# Allegro board LEXICON_GLOVE_6.brd
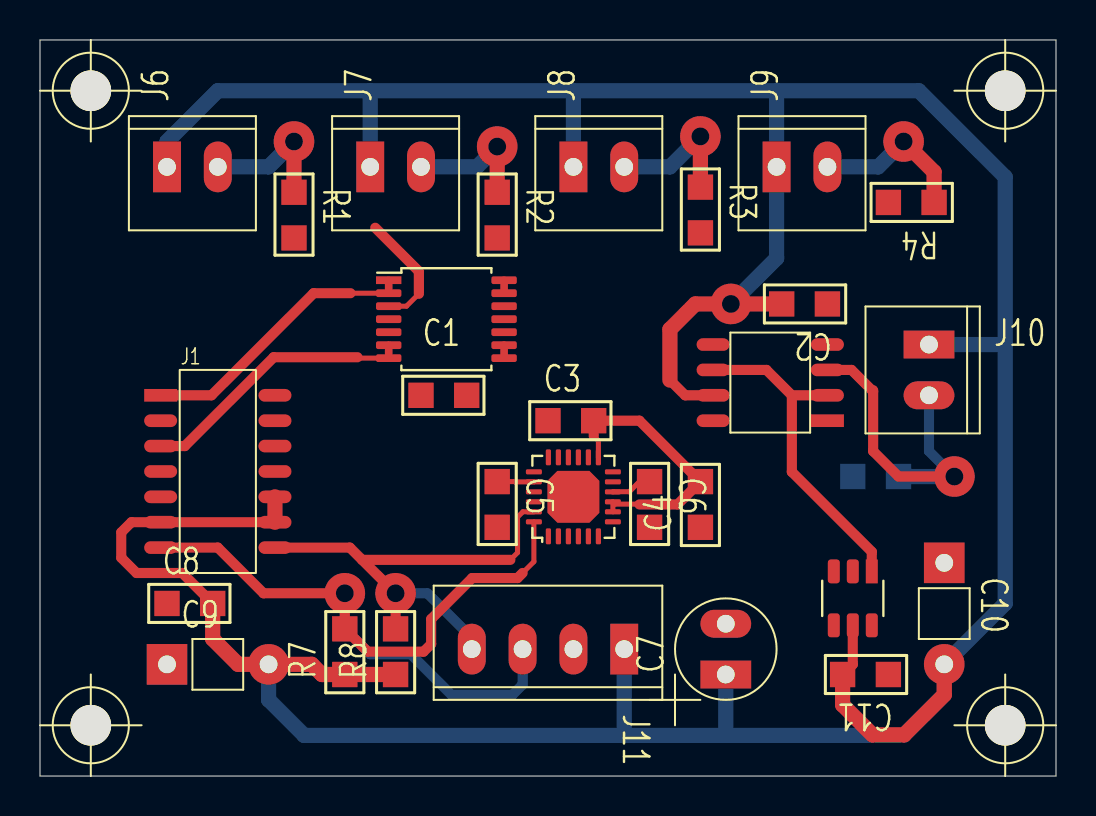
[diagram p0: board, top side]
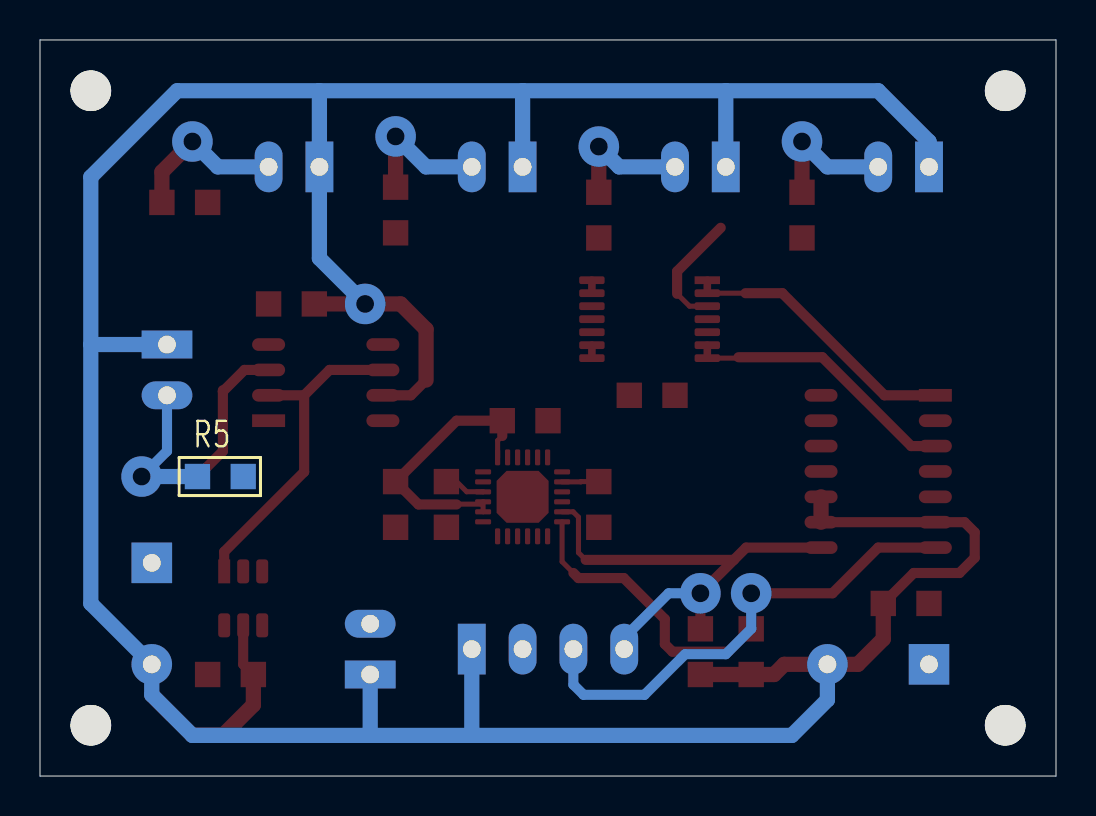
[diagram p1: board, bottom side, seen from below]

Outline 50.8 x 36.83 mm; copper layers: TOP, BOTTOM. Coordinates in mm from the lower left corner of the outline.
Outline path: 0,36.83 0,0 50.8,0 50.8,36.83 0,36.83

## Design rules (mm)
constraint set DEFAULT: min track width 0.254

## Placement (name value [footprint] x y rotation side)
C1  100n  [GU-R0805]  19.05 19.05 0 top
C2  100n  [GU-R0805]  39.37 23.62 180 top
C3  100n  [GU-R0805]  25.4 17.78 0 top
C4  10n  [GU-R0805]  33.02 12.45 90 top
C5  2n2  [GU-R0805]  22.86 14.73 270 top
C6  100n  [GU-R0805]  30.48 14.73 270 top
C7  10u  [GU-CAPCYL100]  34.29 5.08 90 top
C8  100n  [GU-R0805]  6.35 8.64 0 top
C9  10u  [GU-RC200]  6.35 5.59 0 top
C10  10u  [GU-RC200]  45.21 10.67 270 top
C11  100n  [GU-R0805]  42.42 5.08 180 top
J1  MCP3428  [GU-SOIC14]  8.89 15.24 0 top
J3  MCP3421  [SOT23-6P95_280X145L45X37]  40.64 8.89 180 top
J5  MPU-6050  [QFN25P50_400X400X95L35X24T260]  26.67 13.97 0 top
J6  F1  [GU-MOLEX2]  6.35 30.48 90 top
J7  F2  [GU-MOLEX2]  16.51 30.48 90 top
J8  F3  [GU-MOLEX2]  26.67 30.48 90 top
J9  F4  [GU-MOLEX2]  36.83 30.48 90 top
J10  F5  [GU-MOLEX2]  44.45 21.59 0 top
J11  PI  [GU-MOLEX4]  29.21 6.35 270 top
NOREF  -  [unnamed]  2.54 2.54 0 top
NOREF#2  -  [unnamed]  48.26 34.29 0 top
NOREF#3  -  [unnamed]  2.54 34.29 0 top
NOREF#4  -  [unnamed]  48.26 2.54 0 top
R1  33k  [GU-R0805]  12.7 29.21 270 top
R2  33k  [GU-R0805]  22.86 29.21 270 top
R3  33k  [GU-R0805]  33.02 29.46 270 top
R4  33k  [GU-R0805]  44.7 28.7 180 top
R5  33k  [GU-R0805]  42.93 14.99 180 bottom
R7  10k  [GU-R0805]  15.24 5.08 90 top
R8  10k  [GU-R0805]  17.78 5.08 90 top
U1  TL074  [SOP14P65_500X640X120L60X24]  20.32 22.86 270 top
U2  TL071  [GU-SOIC8]  39.37 17.78 180 top

## Library data of the parts
C1-C6 C8-C11 = CAP NP
C7 = C
J1 = CON14C
J3 = CON6AP_0
J5 = CON24C_2
J6-J10 = CON2
J11 = CON4
R1-R5 R7 R8 = RESISTOR
U1 = TL074
U2 = TL071_1

## Footprints (pads in the part's own frame, mm; a bottom-side part is the same pattern mirrored in y, then rotated)
GU-CAPCYL100
  rect 1.397x2.54 hole 0.889: 1(0,0)
  oval 1.397x2.54 hole 0.889: 2(2.54,0)
GU-MOLEX2
  rect 2.54x1.397 hole 0.889: 1(0,0)
  oval 2.54x1.397 hole 0.889: 2(0,-2.54)
GU-MOLEX4
  rect 2.54x1.397 hole 0.889: 1(0,0)
  oval 2.54x1.397 hole 0.889: 2(0,-2.54) 3(0,-5.08) 4(0,-7.62)
GU-R0805
  rect 1.27x1.27 smd: 1(0,0) 2(2.286,0)
GU-RC200
  rect 2.032x2.032 hole 0.889: 1(0,0)
  round 2.032 hole 0.889: 2(5.08,0)
GU-SOIC8
  rect 1.651x0.635 smd: 1(0,0)
  oval 1.651x0.635 smd: 2(0,-1.27) 3(0,-2.54) 4(0,-3.81) 5(5.715,-3.81) 6(5.715,-2.54) 7(5.715,-1.27) 8(5.715,0)
GU-SOIC14
  rect 1.651x0.635 smd: 1(-2.857,3.81)
  oval 1.651x0.635 smd: 2(-2.857,2.54) 3(-2.857,1.27) 4(-2.857,0) 5(-2.857,-1.27) 6(-2.857,-2.54) 7(-2.857,-3.81) 8(2.857,-3.81) 9(2.857,-2.54) 10(2.857,-1.27) 11(2.857,0) 12(2.857,1.27) 13(2.857,2.54) 14(2.857,3.81)
QFN25P50_400X400X95L35X24T260
  rrect 0.26x0.8 smd: 1(-1.25,-1.975) 2(-0.75,-1.975) 3(-0.25,-1.975) 4(0.25,-1.975) 5(0.75,-1.975) 6(1.25,-1.975) 13(1.25,1.975) 14(0.75,1.975) 15(0.25,1.975) 16(-0.25,1.975) 17(-0.75,1.975) 18(-1.25,1.975)
  rrect 0.8x0.26 smd: 7(1.975,-1.25) 8(1.975,-0.75) 9(1.975,-0.25) 10(1.975,0.25) 11(1.975,0.75) 12(1.975,1.25) 19(-1.975,1.25) 20(-1.975,0.75) 21(-1.975,0.25) 22(-1.975,-0.25) 23(-1.975,-0.75) 24(-1.975,-1.25)
  rrect 2.6x2.6 smd: 25(0,0)
SOP14P65_500X640X120L60X24
  rect 0.39x1.27 smd: 1(-1.95,-2.885)
  rrect 0.39x1.27 smd: 2(-1.3,-2.885) 3(-0.65,-2.885) 4(0,-2.885) 5(0.65,-2.885) 6(1.3,-2.885) 7(1.95,-2.885) 8(1.95,2.885) 9(1.3,2.885) 10(0.65,2.885) 11(0,2.885) 12(-0.65,2.885) 13(-1.3,2.885) 14(-1.95,2.885)
SOT23-6P95_280X145L45X37
  rect 0.6x1.2 smd: 1(-0.95,-1.35)
  rrect 0.6x1.2 smd: 2(0,-1.35) 3(0.95,-1.35) 4(0.95,1.35) 5(0,1.35) 6(-0.95,1.35)
unnamed
  round 2.032 hole 3.962 unplated: (0,0)

## Nets
3V3: C1.2 C2.2 C3.2 C4.2 C7.1 C8.2 C9.2 C10.2 C11.2 J1.6 J1.9 J1.10 J3.5 J5.8 J5.9 J5.13 J6.1 J7.1 J8.1 J9.1 J10.1 J11.1 R7.1 R8.1 U1.4 U2.7
GND: C1.1 C2.1 C3.1 C4.1 C5.2 C6.2 C7.2 C8.1 C9.1 C10.1 C11.1 J1.2 J1.4 J1.5 J1.12 J1.14 J3.2 J3.6 J5.18 J11.2 R1.2 R2.2 R3.2 R4.2 R5.2 U1.11 U2.4(V-)
FING1: J1.1 U1.1 U1.2
FING2: J1.3 U1.6 U1.7
FING3: J1.11 U1.8 U1.9
FING4: J1.13 U1.13 U1.14(OUT)
FING5: J3.1 U2.2 U2.6
SCL: J1.8 J3.3 J5.23 J11.4 R8.2
SDA: J1.7 J3.4 J5.24 J11.3 R7.2
N00544: J6.2 R1.1 U1.3
N00572: J7.2 R2.1 U1.5
N00597: J8.2 R3.1 U1.10
N00622: J9.2 R4.1 U1.12
N00734: J10.2 R5.1 U2.3
N04896: C5.1 J5.20
N05186: C6.1 J5.10

Pads without a net: J5 1 2 3 4 5 6 7 11 12 14 15 16 17 19 21 22 25; U2 1 5 8

## Via types
v1: diameter 2.032, hole 0.889, TOP to BOTTOM, 8 vias

## Routing (per net, layer and track width the routed paths; a pad name or vN(x,y) marks a point on that pad's centre or on a via; arc(x,y) is an arc through that point)
3V3: length 205.7
  TOP w0.254: J5.13 27.92,16.78 27.69,17.02 ; J5.8 J5.9 28.76,13.6 29.96,13.6 29.97,13.59
  TOP w0.508: J3.5 40.64,5.59 C11.2 ; C8.2 7.11,10.16 4.83,10.16 4.06,10.92 4.06,12.19 4.57,12.7 J1.6 J1.9 ; 31.5,19.81 32.26,19.05 U2.7 ; 27.69,17.02 C3.2 29.97,17.78 C4.2 31.88,13.59 29.97,13.59
  TOP w0.762: C2.2 v1(34.54,23.62) 32.77,23.62 31.5,22.35 31.5,19.81 ; J1.9 J1.10 ; R8.1 R7.1 14.1,5.08 13.59,5.59 C9.2 9.91,5.59 8.64,6.86 C8.2 ; C11.2 40.13,3.56 41.63,2.06 43.21,2.06 45.21,4.06 C10.2
  BOTTOM w0.762: 29.22,2.03 29.21,2.05 J11.1 ; 29.22,2.03 13.21,2.03 11.43,3.81 C9.2 ; 29.22,2.03 34.29,2.03 ; 26.67,34.29 36.83,34.29 ; 26.67,34.29 16.51,34.29 ; 26.67,34.29 J8.1 ; 36.83,34.29 J9.1 36.83,25.91 v1(34.54,23.62) ; 36.83,34.29 43.94,34.29 48.26,29.97 48.26,21.59 ; 16.51,34.29 J7.1 ; 16.51,34.29 8.89,34.29 6.35,31.75 J6.1 ; 48.26,21.59 48.26,8.64 C10.2 45.21,4.06 43.18,2.03 34.29,2.03 ; 48.26,21.59 J10.1 ; 34.29,2.03 C7.1
FING1: length 14.2
  TOP w0.254: 15.52,24.16 U1.2
  TOP w0.381: U1.2 U1.1
  TOP w0.508: J1.1 8.57,19.05 13.68,24.16 15.52,24.16
FING2: length 13.9
  TOP w0.254: U1.7 15.92,20.91 15.87,20.96
  TOP w0.381: U1.7 U1.6
  TOP w0.508: 15.87,20.96 11.68,20.96 7.24,16.51 J1.3
FING3: length 0.6
  TOP w0.381: U1.8 U1.9
FING4: length 0.6
  TOP w0.381: U1.13 U1.14
FING5: length 16.7
  TOP w0.508: U2.2 37.59,19.05 ; 37.59,19.05 36.32,20.32 U2.6 ; 37.59,19.05 37.59,15.22 41.59,11.22 J3.1
SCL: length 24.7
  TOP w0.254: 23.52,10.82 23.88,11.18 23.88,12.95 24.14,13.22 J5.23
  TOP w0.508: R8.2 v1(17.78,9.14) 16.11,10.82 ; 16.11,10.82 15.49,11.43 J1.8 ; 16.11,10.82 23.52,10.82
  BOTTOM w0.508: J11.4 21.59,6.92 19.37,9.14 v1(17.78,9.14)
SDA: length 40.5
  TOP w0.254: 24.13,10.16 24.69,10.72 J5.24
  TOP w0.508: 24.13,10.16 23.88,9.91 21.61,9.91 19.56,7.85 19.56,6.6 19.18,6.22 16.38,6.22 R7.2 v1(15.24,9.14) 11.18,9.14 8.89,11.43 J1.7
  BOTTOM w0.508: J11.3 24.13,4.57 23.62,4.06 20.57,4.06 18.54,6.1 16.51,6.1 R7.2 v1(15.24,9.14)
N00544: length 12.8
  TOP w0.254: U1.3 18.32,23.51 18.94,24.13
  TOP w0.508: 16.76,27.43 18.94,25.25 18.94,24.13
  TOP w0.762: v1(12.7,31.75) R1.1
  BOTTOM w0.762: J6.2 11.43,30.48 v1(12.7,31.75)
N00572: length 6.5
  TOP w0.762: v1(22.86,31.5) R2.1
  BOTTOM w0.762: J7.2 21.84,30.48 v1(22.86,31.5)
N00597: length 7
  TOP w0.762: v1(33.02,32) R3.1
  BOTTOM w0.762: v1(33.02,32) 31.5,30.48 J8.2
N00622: length 8
  TOP w0.762: v1(43.18,31.75) 44.7,30.23 R4.1
  BOTTOM w0.762: v1(43.18,31.75) 41.91,30.48 J9.2
N00734: length 17.8
  TOP w0.508: U2.3 40.58,20.32 41.66,19.24 ; 41.66,19.24 41.66,16.26 R5.1 v1(45.72,14.99) ; 41.66,19.24 41.66,19.3
  BOTTOM w0.508: J10.2 44.45,16.26 v1(45.72,14.99)
  BOTTOM w0.762: R5.1 v1(45.72,14.99)
N04896: length 1.8
  TOP w0.254: C5.1 23.75,14.73 23.76,14.72 J5.20
N05186: length 2
  TOP w0.254: C6.1 29.97,14.73 29.46,14.22 28.65,14.22 J5.10
